# Altium PCB MCU-3.14-NEW.PcbDoc
Units mil, origin at the board's own origin, x right, y up, seen from the top; angles counter-clockwise.
Board outline 1574.8 x 1496.06 mil, 2 copper layers (Top Layer, Bottom Layer); 36 components, 67 nets, 265 pads, 66 vias.
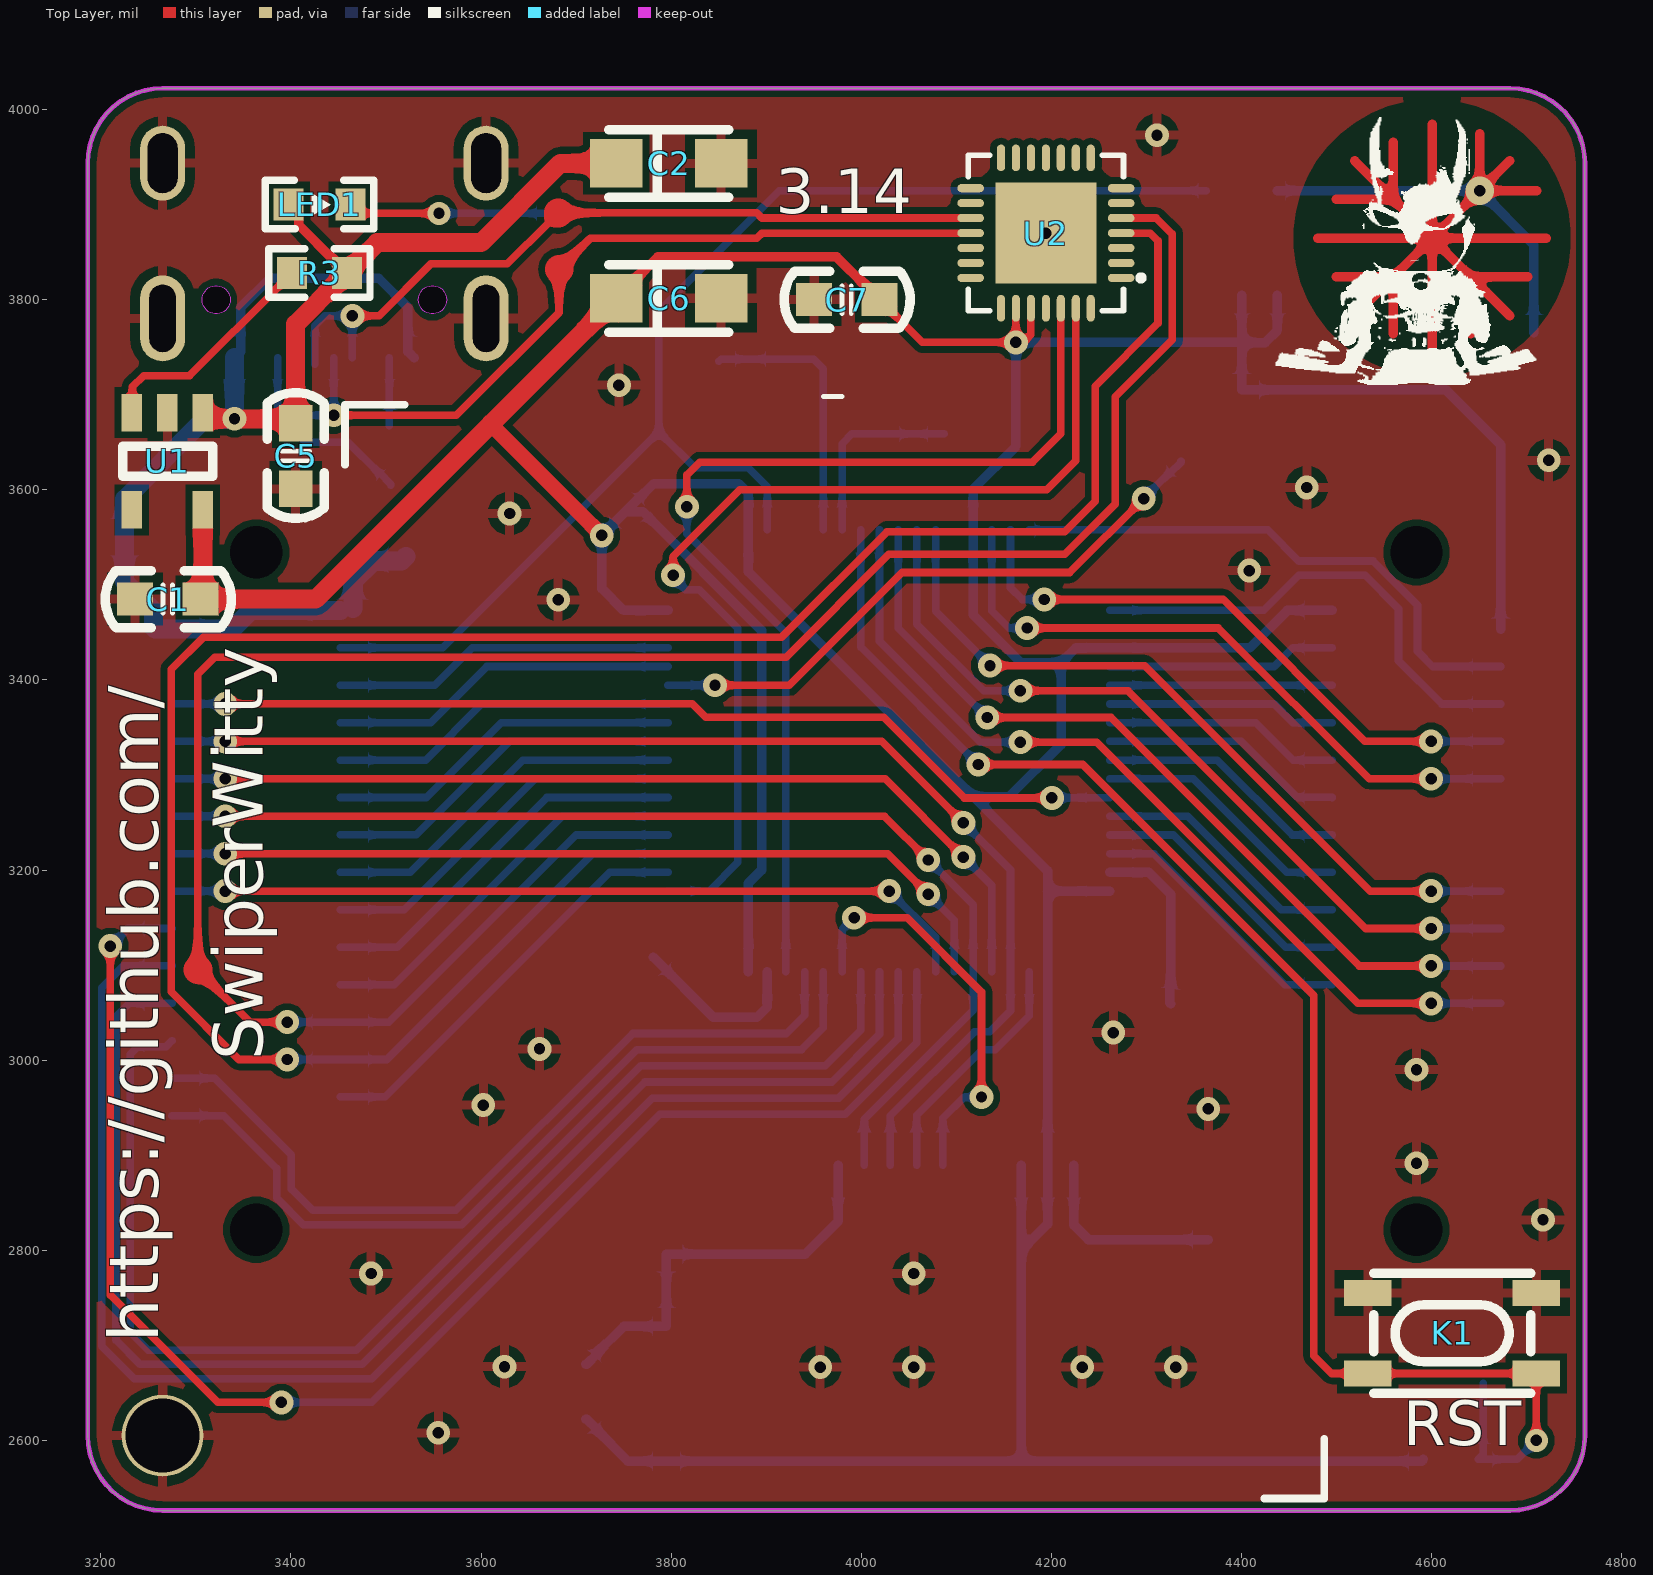
[diagram p0: Top Layer view]
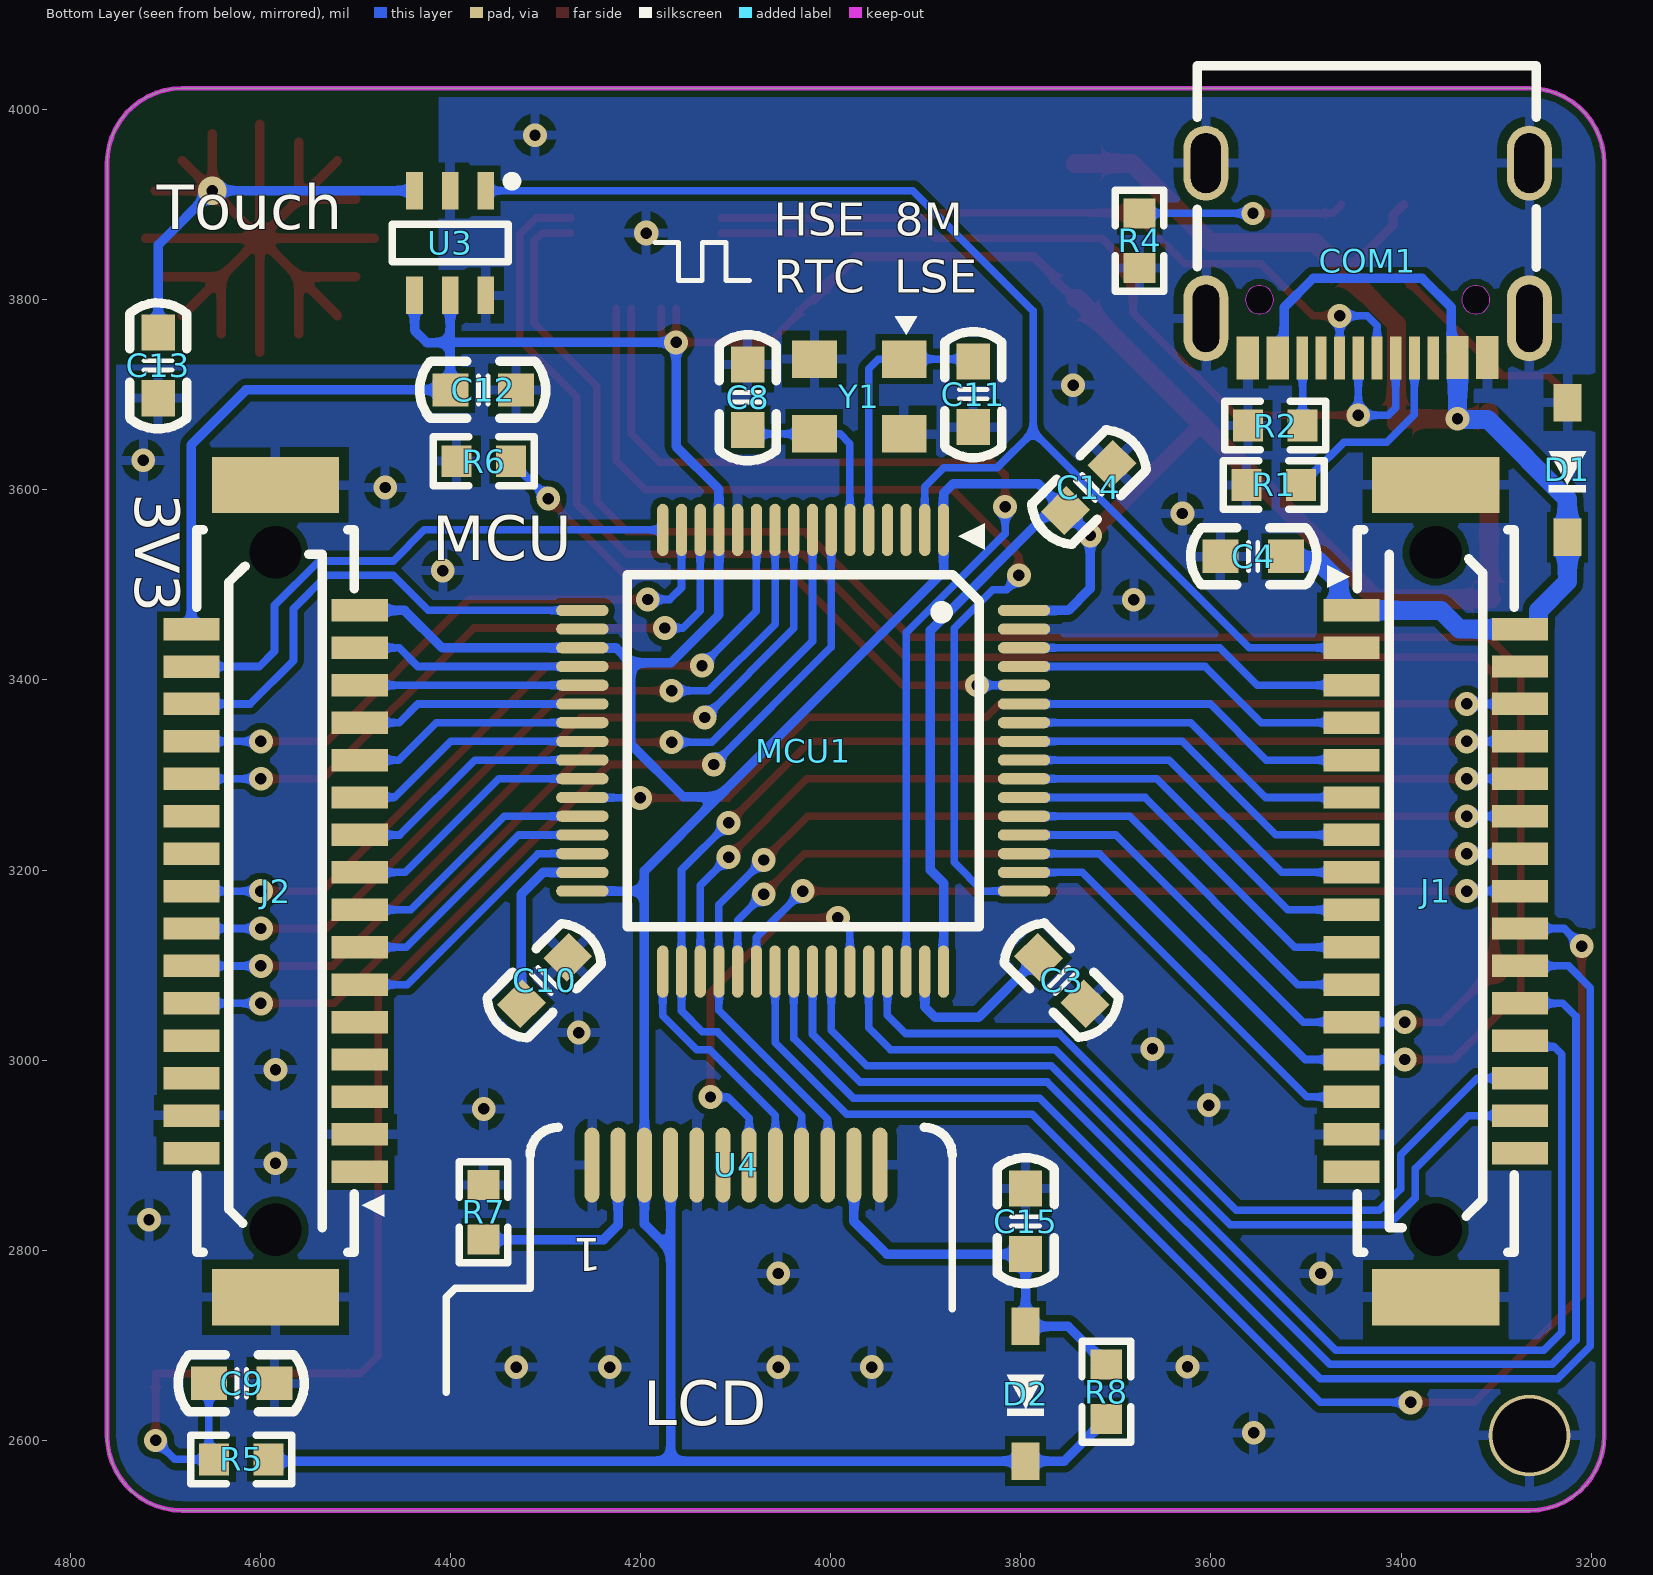
[diagram p1: Bottom Layer view, seen from below]
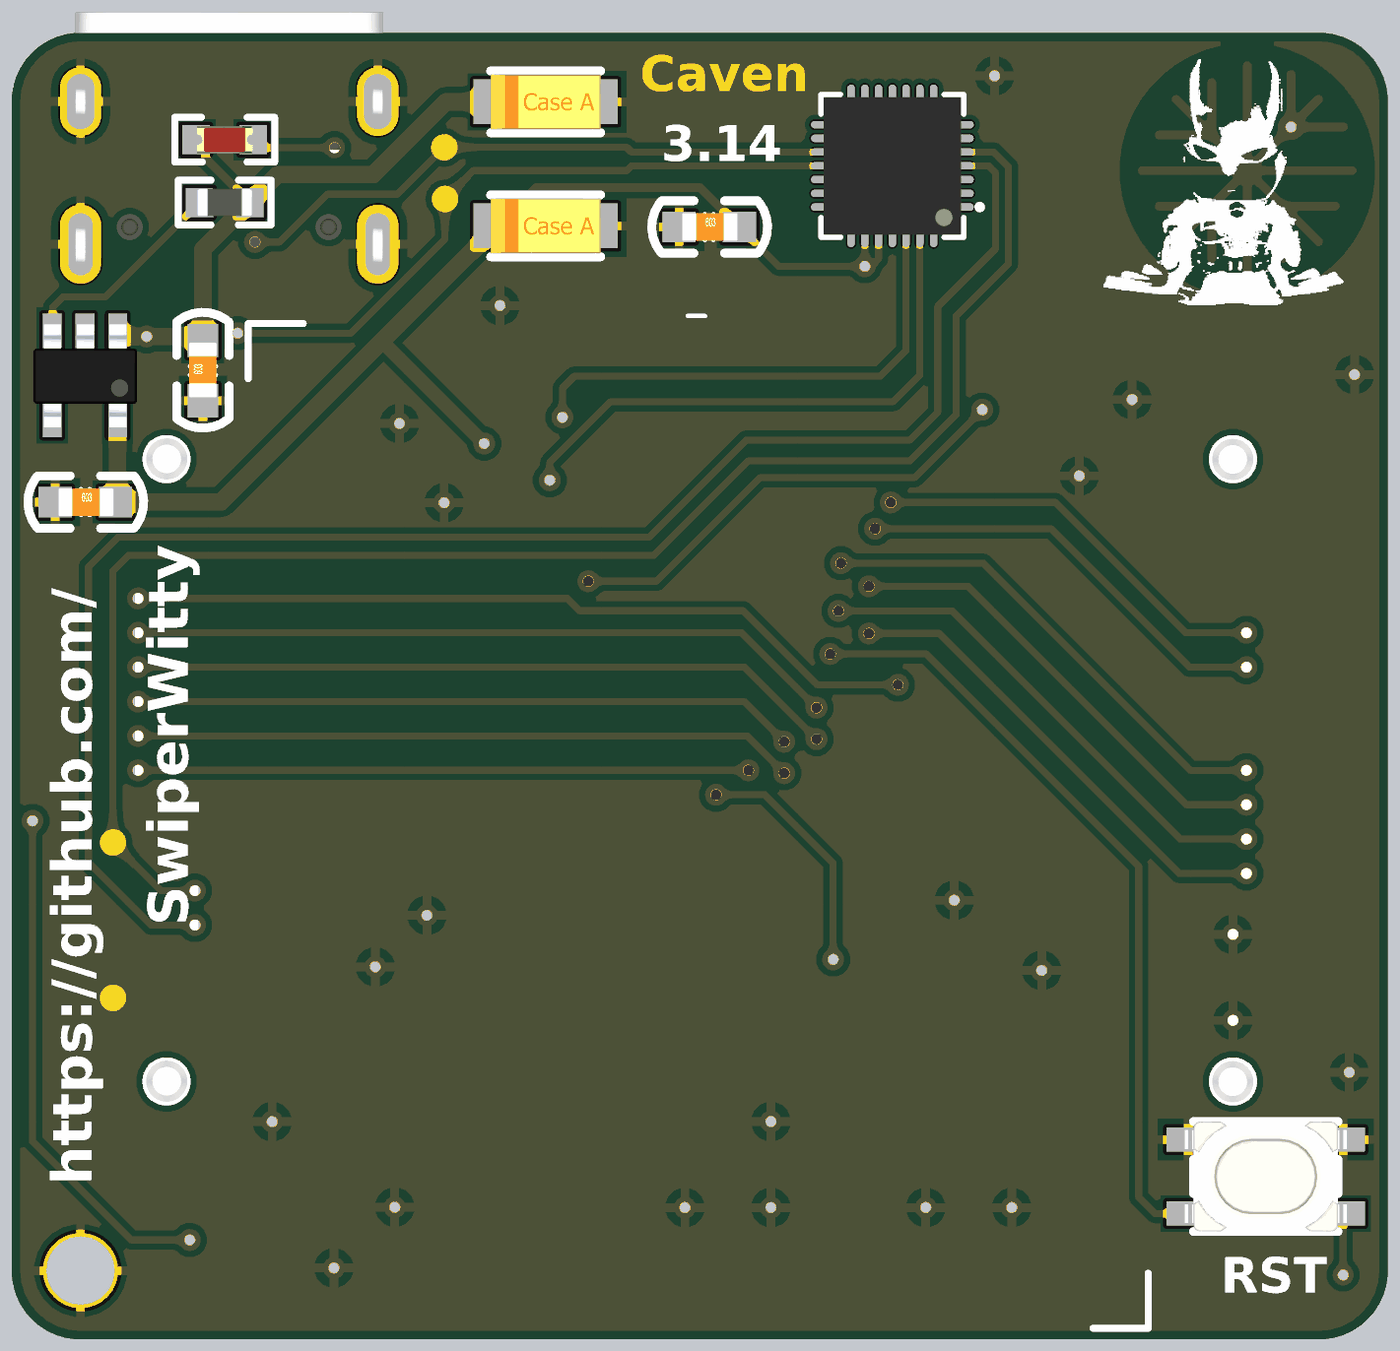
[diagram p2: 3D render of the assembled board from above, using the file's embedded part models]
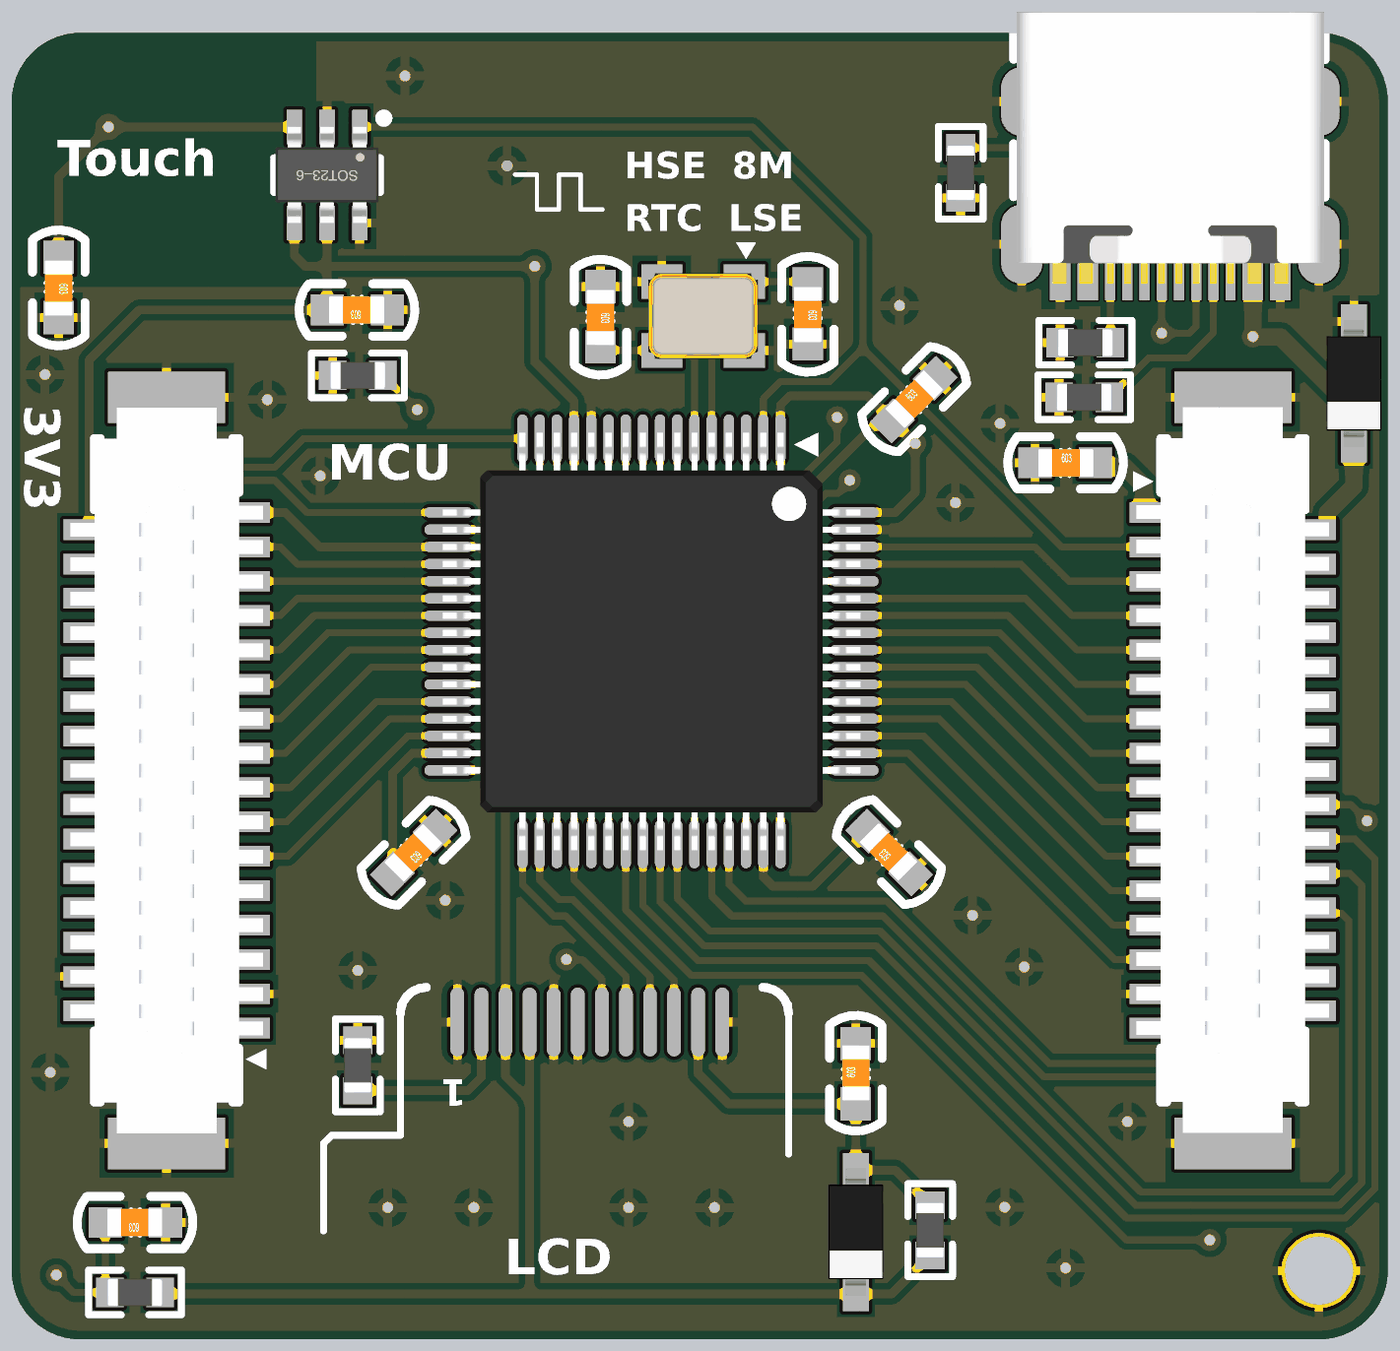
[diagram p3: 3D render of the assembled board from below, using the file's embedded part models]

## Layer stack, top to bottom
Top Solder: solder mask 0.4, Solder Resist, Dk 3.5
Top Layer: signal copper 1.4
Dielectric 1: dielectric 12.6, FR-4, Dk 4.8
Bottom Layer: signal copper 1.4
Bottom Solder: solder mask 0.4, Solder Resist, Dk 3.5

## Board outline
3186.26,2605 ccw(c3265,2605) 3265,2526.26 4682.32,2526.26 ccw(c4682.32,2605) 4761.06,2605 4761.06,3943.58 ccw(c4682.32,3943.58) 4682.32,4022.32 3297.49,4022.32 3265,4022.32 ccw(c3265,3943.58) 3186.26,3943.58

## Design rules (kind name [scope] priority, off if disabled: settings)
Clearance [All] p1: gap=7 ignorepadtopadclearanceinfootprint=TRUE
HoleSize [All] p1: absolutevalues=TRUE maxlimit=500 minlimit=1 maxpercent=80.000 minpercent=20.000
HoleToHoleClearance [All] p1: gap=6 allowstackedmicrovias=TRUE
MinimumSolderMaskSliver [All] p1: minsoldermaskwidth=3
PolygonConnect [All] p1: connectstyle=Relief reliefconductorwidth=10 reliefentries=4 polygonreliefangle="90 Angle" airgapwidth=10
RoutingVias [All] p1: holewidth=28 width=50 viastyle="Through Hole" minholewidth=12 minwidth=24 maxholewidth=28 maxwidth=50
SilkToSilkClearance [All] p1: silktosilkclearance=0
SilkToSolderMaskClearance [IsPad] p1: minsilkscreentomaskgap=0 clearancetoexposedcopper=TRUE
SolderMaskExpansion [All] p1: expansion=4 istentingtop=FALSE
Width [All] p1: maxlimit=60 minlimit=8 preferedwidth=8
25 further rules are at their usual default settings.

## Classes and differential pairs
component class Sheet1: C1 C2 C3 C5 C7 C9 C11 C13 C15 COM1 D1 D2 J1 J2 K1 LED1 MCU1 R1 R2 R3 R4 R5 R6 R7 R8 U1 U2 U3 U4 Y1

## Components (designator, comment, footprint, x,y, rotation, side; value= is the part's Value field where it differs from the comment)
C1 "100NF" CAP_0603 3236,3485 r0 top
C2 "100UF" CAP_3216_A 3797.32,3943.28 r180 top
C3 "10UF" CAP_0603 3732.48,3059.4 r45 bottom
C4 "100NF" CAP_0603 3590,3530 r180 bottom
C5 "100NF" CAP_0603 3405,3601 r90 top
C6 "100UF" CAP_3216_A 3797.32,3801.26 r180 top
C7 "100NF" CAP_0603 3950,3800 r0 top
C8 "22PF" CAP_0603 4087.25,3731.71 r270 bottom
C9 "100NF" CAP_0603 4585,2660 r0 bottom
C10 "10UF" CAP_0603 4276.55,3108.19 r315 bottom
C11 "22PF" CAP_0603 3850,3735 r270 bottom
C12 "100NF" CAP_0603 4331,3705 r0 bottom
C13 "22PF" CAP_0603 4707.32,3765.26 r270 bottom
C14 "100NF" CAP_0603 3753,3578 r135 bottom
C15 "4.7UF" CAP_0603 3795,2796 r90 bottom
COM1 "Type-C" USB-Type-C_16A 3435.07,3942.59 r0 bottom
D1 "B5819W" DIODE_SOD123 3225,3691.73 r270 bottom
D2 "1N4148" DIODE_SOD123 3795,2720 r270 bottom
J1 "31PIN" BTB-DM3-31P 3363.43,3534.14 r270 bottom
J2 "31PIN" BTB-DM3-31P 4583.9,2821.54 r90 bottom
K1 "KEY" KEY_SMD-4P 4532.83,2755 r0 top
LED1 "LED_R/G/B/Y" LED_0603_R 3430,3900 r180 top
MCU1 "STM32F405RET6" LQFP_64_10X10 4028.91,3325.47 r0 bottom
R1 "5.1K" RESC_0603_2 3533.74,3605 r180 bottom
R2 "5.1K" RESC_0603_2 3532.32,3667.53 r180 bottom
R3 "10K" RESC_0603_2 3430,3828 r180 top
R4 "10K" RESC_0603_2 3675,3862 r90 bottom
R5 "10K" RESC_0603_2 4620,2580 r0 bottom
R6 "10K" RESC_0603_2 4365,3630 r0 bottom
R7 "20R" RESC_0603_2 4365,2840 r270 bottom
R8 "4.7K" RESC_0603_2 3710,2651.26 r90 bottom
U1 "SPX3819M5-L" SOT23_5 3270,3630 r90 top
U2 "CH549F" QFN28_4X4_L 4273.2,3822.8 r180 top
U3 "TTP223" SOT-23-6 4362.78,3914.58 r270 bottom
U4 "TFT_1.3_12Pin" LCD_1.3B 4271.06,2909.32 r180 top
Y1 "8MHz" XTAL_SMD_3225 3969.85,3698.08 r0 bottom

## Footprints (in the part's own frame and the unit in brackets; to place one, negate y for a bottom-side part, rotate by r counter-clockwise, add the part's x,y. Pads: shape width x height; smd on the part's side, far side on the other; paste and mask are expansions set on the pad)
BTB-DM3-31P [mm]
  rect 0.6x1.5 smd: 1(1.55,-2.25) 2(2.05,2.25) 3(2.55,-2.25) 4(3.05,2.25) 5(3.55,-2.25) 6(4.05,2.25) 7(4.55,-2.25) 8(5.05,2.25) 9(5.55,-2.25) 10(6.05,2.25) 11(6.55,-2.25) 12(7.05,2.25) 13(7.55,-2.25) 14(8.05,2.25) 15(8.55,-2.25) 16(9.05,2.25) 17(9.55,-2.25) 18(10.05,2.25) 19(10.55,-2.25) 20(11.05,2.25) 21(11.55,-2.25) 22(12.05,2.25) 23(12.55,-2.25) 24(13.05,2.25) 25(13.55,-2.25) 26(14.05,2.25) 27(14.55,-2.25) 28(15.05,2.25) 29(15.55,-2.25) 30(16.05,2.25) 31(16.55,-2.25)
  rect 1.5x3.4 smd: 32(19.9,0) 33(-1.8,0)
  round 1.219 hole 1.4 unplated: ""(0,0) ""(18.1,0)
  silkscreen extent -0.6,-2.9 18.7,2.1, body extent -1.51,-2.81 19.59,2.79, height 3.35
CAP_0603 [mil]
  rect 38x35 smd: 1(0,0) 2(69,0)
  silkscreen extent -31,-30 101,30, body extent 4,-16 67,16, height 12
CAP_3216_A [mm]
  rect 1.4x1.3 smd: 1(1.4,0) 2(-1.4,0)
  silkscreen extent -1.6,-0.9 1.6,0.9, body extent -1.6,-0.8 1.6,0.8, height 1.6
DIODE_SOD123 [mm]
  rect 1x0.75 smd: 1(0,0) 2(3.6,0)
  silkscreen extent 1.3,-0.5 2.4,0.5, body extent -0.05,-0.8 3.65,0.8, height 1.27
KEY_SMD-4P [mm] "3*4*2.5MM"
  rect 1.27x0.7 smd: 1(0,0) 1(4.5,0) 2(0,-2.15) 2(4.5,-2.15)
  silkscreen extent 0.15,-2.68 4.35,0.52, body extent -0.1,-2.67 4.6,0.53, height 2.51
LCD_1.3B [mm]
  oval 0.4x2 smd far side: 1(0.508,0.5) 2(1.208,0.5) 3(1.908,0.5) 4(2.608,0.5) 5(3.308,0.5) 6(4.008,0.5) 7(4.708,0.5) 8(5.408,0.5) 9(6.108,0.5) 10(6.808,0.5) 11(7.508,0.5) 12(8.208,0.5)
  silkscreen extent -5.48,-19.81 20.68,9.41, body extent -5.48,-19.81 20.68,9.41, height 1
LED_0603_R [mm]
  rect 0.8x0.85 smd: 1(-0.832,0) 2(0.832,0)
  silkscreen extent -1.45,-0.65 1.45,0.65, body extent -0.81,-0.4 0.81,0.4, height 0.6
LQFP_64_10X10 [mm]
  oval 0.3x1.4 smd: 1(-3.75,-5.9) 2(-3.25,-5.9) 3(-2.75,-5.9) 4(-2.25,-5.9) 5(-1.75,-5.9) 6(-1.25,-5.9) 7(-0.75,-5.9) 8(-0.25,-5.9) 9(0.25,-5.9) 10(0.75,-5.9) 11(1.25,-5.9) 12(1.75,-5.9) 13(2.25,-5.9) 14(2.75,-5.9) 15(3.25,-5.9) 16(3.75,-5.9) 33(3.75,5.9) 34(3.25,5.9) 35(2.75,5.9) 36(2.25,5.9) 37(1.75,5.9) 38(1.25,5.9) 39(0.75,5.9) 40(0.25,5.9) 41(-0.25,5.9) 42(-0.75,5.9) 43(-1.25,5.9) 44(-1.75,5.9) 45(-2.25,5.9) 46(-2.75,5.9) 47(-3.25,5.9) 48(-3.75,5.9)
  oval 1.4x0.3 smd: 17(5.9,-3.75) 18(5.9,-3.25) 19(5.9,-2.75) 20(5.9,-2.25) 21(5.9,-1.75) 22(5.9,-1.25) 23(5.9,-0.75) 24(5.9,-0.25) 25(5.9,0.25) 26(5.9,0.75) 27(5.9,1.25) 28(5.9,1.75) 29(5.9,2.25) 30(5.9,2.75) 31(5.9,3.25) 32(5.9,3.75) 49(-5.9,3.75) 50(-5.9,3.25) 51(-5.9,2.75) 52(-5.9,2.25) 53(-5.9,1.75) 54(-5.9,1.25) 55(-5.9,0.75) 56(-5.9,0.25) 57(-5.9,-0.25) 58(-5.9,-0.75) 59(-5.9,-1.25) 60(-5.9,-1.75) 61(-5.9,-2.25) 62(-5.9,-2.75) 63(-5.9,-3.25) 64(-5.9,-3.75)
  silkscreen extent -4.85,-6.08 4.7,4.7, body extent -6.07,-6.07 6.07,6.07, height 1.62
QFN28_4X4_L [mil]
  oval 28x8.6 smd mask+2: 1(0,0) 2(0,-15.7) 3(0,-31.5) 4(0,-47.2) 5(0,-63) 6(0,-78.7) 7(0,-94.4) 15(158.2,-94.4) 16(158.2,-78.7) 17(158.2,-63) 18(158.2,-47.2) 19(158.2,-31.5) 20(158.2,-15.7) 21(158.2,0)
  oval 8.6x28 smd mask+2: 8(31.9,-126.3) 9(47.6,-126.3) 10(63.4,-126.3) 11(79.1,-126.3) 12(94.9,-126.3) 13(110.6,-126.3) 14(126.3,-126.3) 22(126.3,31.9) 23(110.6,31.9) 24(94.9,31.9) 25(79.1,31.9) 26(63.4,31.9) 27(47.6,31.9) 28(31.9,31.9)
  rect 106.3x106.3 smd mask+2: 29(79.1,-47.2)
  silkscreen extent -24,-129 161,35, body extent 0,-126 158,32, height 35
RESC_0603_2 [mm]
  rect 0.8x0.85 smd: 1(-0.73,0) 2(0.73,0)
  silkscreen extent -1.35,-0.65 1.35,0.65, body extent -0.8,-0.4 0.8,0.4, height 0.38
SOT23_5 [mm]
  rect 1x0.55 smd: 1(1.3,-0.95) 2(1.3,0) 3(1.3,0.95) 4(-1.3,0.95) 5(-1.3,-0.95)
  silkscreen extent -0.4,-1.21 0.4,1.19, body extent -1.52,-1.51 1.48,1.49, height 1.3
SOT-23-6 [mm]
  rect 1x0.45 smd: 1(0,0) 2(0,-0.95) 3(0,-1.9) 4(2.794,-1.9) 5(2.794,-0.95) 6(2.794,0)
  silkscreen extent -0.38,-2.5 1.91,0.82, body extent -0.01,-2.45 2.8,0.55, height 1.15
USB-Type-C_16A [mm]
  oval 1.199x1.999 hole 0.8 slot 1.6 at 90 deg mask+0.051: 0(-4.32,-0.025) 0(4.321,-0.025)
  oval 1.199x2.301 hole 0.701 slot 1.801 at 90 deg mask+0.051: 0(-4.32,4.123) 0(4.321,4.123)
  round 0 hole 0.65: 0(-2.889,3.592) 0(2.891,3.592)
  rect 0.3x1.151 smd mask+0.05: A5(-1.249,5.179) A6(-0.248,5.177) A7(0.25,5.177) A8(-1.749,5.177) B5(1.751,5.177) B6(0.75,5.177) B7(-0.749,5.177) B8(1.25,5.177)
  rect 0.599x1.151 smd mask+0.05: A9(-2.4,5.174) A12(-3.2,5.174) B1(3.201,5.177) B4(2.401,5.177)
  Keep-Out Layer board cut-out: -2.514,3.625 -2.551,3.788 -2.655,3.919 -2.806,3.991 -2.973,3.991 -3.124,3.919 -3.229,3.788 -3.266,3.625 -3.266,3.625 -3.229,3.462 -3.124,3.331 -2.973,3.258 -2.806,3.258 -2.655,3.331 -2.551,3.462 -2.514,3.625
  Keep-Out Layer board cut-out: 3.267,3.625 3.23,3.788 3.126,3.919 2.975,3.991 2.808,3.991 2.657,3.919 2.553,3.788 2.515,3.625 2.515,3.625 2.553,3.462 2.657,3.331 2.808,3.258 2.975,3.258 3.126,3.331 3.23,3.462 3.267,3.625
  silkscreen extent -4.5,-2.63 4.56,2.75, body extent -4.47,-2.63 4.47,5.27, height 3.25
XTAL_SMD_3225 [mm]
  rect 1.2x1 smd: 1(-1.2,-1) 2(1.2,-1) 3(1.2,1) 4(-1.2,1)
  silkscreen extent -1.55,-2.15 -0.95,-1.65, body extent -1.6,-1.25 1.6,1.25, height 0.6

## Part data
C1 C3 C4 C5 C7 C8 C9 C10 C11 C12 C13 C14 C15: library part CAP, "CAP  12~50V"
C2 C6: library part CAP_TA, "CAP  6~12V  钽电容"
COM1: library part USB-type_c, "USB"
D1 D2: library part Diode-SM, "Diode_肖特基/二极管"
J1 J2: library part BTB_DF3_31Pin, "BTB"
K1: "Key"
LED1: library part LED_SMT, "LED"
MCU1: library part STM32f4_R, "MCU"
R1 R2 R3: library part RES, "RES 贴片"
R4 R5 R6 R7 R8: library part RES_S, "RES 贴片"
U1: "DC-DC   3.3V  500ma"
U2: "MCU", External Clock Frequency Rang=6MHz~25MHz, JLCPCB Part Class="Extended Part", Manufacturer=WCH(南京沁恒), Maximum Frequency=48MHz, Operating Temperature Range=-40~+70, Supply Voltage Range=3.3V~5V, 8Bit Timer Number=-, 16Bit Timer Number=3, 32Bit Timer Number=-, (E)PWM (Units/Channels/bits)=1@x8ch/8bit, (Q)SPI Number=1, ADC (Units/Channels/bits)=1@x16ch/12bit, Add into BOM=yes, CAN Number=-, CMP Number=-, Convert to PCB=yes, CPU Core=51系列, DAC (Units/Channels/bits)=-, Datasheet=https://atta.szlcsc.com/upload/public/pdf/source/20200819/C367229_D216FC0E0489DFB21C5778C34F7DC8A5.pdf, Device=CH549F, EEPROM/Data FLASH Size=1KB, GPIO Ports Number=-, I2C Number=-, I2S Number=-, Internal Oscillator=有, LCSC Part Name=CH549F, Manufacturer Part=CH549F, Peripherals / Functions / Protocol Stacks=低电压检测；看门狗；CCP捕获/比较；触控按键；片载温度传感器；CRC校验；DMA, Program FLASH Size=64KB, RAM Size=2.25KB, Supplier=LCSC, Supplier Footprint=QFN-28, Supplier Part=C367229, Symbol=CH549F, U(S)ART Number=4, USB (H/D/OTG)="全速USB Host/Device"
U3: "触摸芯片"
U4: library part "LCD_1.3   T", "ST7789V-SPI"
Y1: library part XTAL_4P, "Crystal Oscillator"

## Free pads (board coordinates)
  round 86 hole 78: 0(3265,2605)

## Via types
v1: diameter 25, hole 12, Top Layer to Bottom Layer, tented both sides, 62 vias
v2: diameter 24, hole 12, Top Layer to Bottom Layer, tented both sides, 2 vias
v3: diameter 30, hole 12, Top Layer to Bottom Layer, tented both sides, 1 vias
v4: diameter 26, hole 12, Top Layer to Bottom Layer, tented both sides, 1 vias

## Nets (pads, with @x,y where several pads share a name; then routed paths per layer and width w, separated by ;. In a path a pad name is that pad's centre, name@x,y a point inside that pad or via, vN(x,y) a via of type N, cw(c..) or ccw(c..) an arc to the next point about the centre after c; other vN are vias at no path point)
BOOT0: MCU1.60 R6.1 | length 637.8
  Top Layer w8: v1(3846.08,3394.37) 3924.33,3394.37 4042.96,3513 4219.26,3513 v1(4297,3590.74)
  Bottom Layer w8: MCU1.60 v1(3846.08,3394.37) ; v1(4297,3590.74) 4323.53,3617.27 4324.51,3617.27 4336.26,3629.02 R6.1
BOOT1: J2.15 MCU1.28 | length 274.9
  Bottom Layer w8: MCU1.28 4343.43,3256.57 4441.85,3158.15 J2.15
CAN_RX: J1.28 MCU1.44 | length 895.7
  Bottom Layer w8: J1.28 3329.38,2941.62 3385,2886 3385,2855 3413,2827 3579.57,2827 3763.57,3011 3937,3011 3960.01,3034.01 MCU1.44
CAN_TX: J1.26 MCU1.45 | length 875
  Bottom Layer w8: J1.26 3320.01,2980.99 3400.5,2900.5 3400.5,2864.5 3423,2842 3573.36,2842 3759.36,3028 3921,3028 3940.33,3047.33 MCU1.45
CC1: COM1.A5 R1.2 | length 210
  Bottom Layer w8: COM1.A5 3385.9,3679.1 3415,3650 3460,3650 3492.27,3617.73 3493.25,3617.73 3505,3605.98 R1.2
CC2: COM1.B5 R2.2 | length 71.3
  Bottom Layer w8: R2.2 COM1.B5@3503.58,3738.78
CH_RXD: J1.25 MCU1.51 U2.4 | length 2369.6
  Top Layer w8: v1(3396.01,3000.67) 3345.33,3000.67 3274,3072 3274,3411 3308,3445 3916,3445 4027,3556 4214,3556 4246,3588 4246,3709 4312,3775 4312,3862 4304,3870 U2.4
  Bottom Layer w8: v1(3396.01,3000.67) J1.25 3500.67,3000.67 3717.2,3217.2 MCU1.51
CH_TXD: J1.23 MCU1.52 U2.5 | length 2319.1
  Top Layer w8: v1(3396.01,3040.04) 3356.96,3040.04 3302,3095 3302,3406 3320,3424 3921,3424 4029,3532 4214,3532 4267,3585 4267,3698 4327,3758 4327,3869 4310.2,3885.8 U2.5
  Top Layer w30: 3302,3095 3302.28,3095.28
  Bottom Layer w8: v1(3396.01,3040.04) J1.23 3503.04,3040.04 3699.89,3236.89 MCU1.52
D+: COM1.A6 COM1.B6 U2.17 | length 825.7
  Top Layer w8: v1(3464.6,3782.84) 3492.63,3782.84 3547.32,3837.53 3627.63,3837.53 3670.43,3880.33 ; 3670.57,3880.47 3670.71,3880.61 3681.38,3891.27 3890,3891.27 3895.47,3885.8 U2.17
  Top Layer w30: 3681.1,3890.99 3681.38,3891.27
  Bottom Layer w8: COM1.A6@3425.23,3732.25 3425.23,3772.44 3435.63,3782.84 v1(3464.6,3782.84) COM1.B6
D-: COM1.A7 COM1.B7 U2.18 | length 931.3
  Top Layer w8: v1@3446.1,3677.21 3447.29,3678.4 3573.95,3678.4 3682,3786.45 3682,3831.89 3714.63,3864.53 3890,3864.53 3895.47,3870 U2.18
  Top Layer w30: 3682,3831.89 3682.28,3832.17
  Bottom Layer w8: COM1.B7 3405.6,3686.3 3413.5,3678.4 v1(3444.97,3678.4) 3444.97,3738.71 COM1.A7
D/C: MCU1.43 U4.7 | length 437.7
  Top Layer w8: v1(3992.32,3149.84) 4048.16,3149.84 4126.32,3071.68 v1(4126.32,2961.26)
  Bottom Layer w8: MCU1.43 3979.7,3137.21 v1(3992.32,3149.84) ; U4.7 4085.71,2938.71 4107.97,2960.97 4126.03,2960.97 v1(4126.32,2961.26)
DAC_OUT1: J2.29 MCU1.20 | length 242.3
  Bottom Layer w8: MCU1.20 4434.05,3414.05 4453.74,3433.74 J2.29
DAC_OUT2: J2.27 MCU1.21 | length 234.1
  Bottom Layer w8: MCU1.21 J2.27
DIR: J2.21 MCU1.24 | length 258.6
  Bottom Layer w8: MCU1.24 4399.69,3335.31 4458.47,3276.53 4495.04,3276.53 J2.21
GND: C1.1 C2.2 C3.1 C4.1 C5.1 C6.2 C7.1 C8.1 C9.1 C10.1 C11.2 C12.1 C13.2 C14.2 C15.2 COM1.0@3265,3780.28 COM1.0@3265,3943.58 COM1.0@3605.2,3780.28 COM1.0@3605.2,3943.58 COM1.A12 COM1.B1 D1.1 J1.29 J1.32 J1.33 J2.3 J2.4 J2.32 J2.33 K1.1 MCU1.12 MCU1.18 MCU1.63 pad.0 R1.1 R2.1 R4.1 R6.2 R7.1 U1.2 U2.29 U3.2 U3.6 U4.1 U4.5 U4.6 U4.12 Y1.2 Y1.4
  other v1: 3555,2608 3956.69,2677.17 4055.12,2677.17 4232.28,2677.17 4330.71,2677.17 3624.6,2677.6 3484.25,2775.59 4055.12,2775.59 4717,2832 4583.9,2891.54 4365,2948.74 3602.36,2952.76 4583.9,2989.96 3661.42,3011.81 4265,3029 3681.1,3484.25 4408,3515 3630,3575 4468.5,3602.36 4723,3631 3745,3710 4311,3973
  other v4: 4194.1,3870
GPIOA: J1.15 MCU1.56 | length 393.5
  Bottom Layer w8: J1.15 3525.53,3197.53 3643.63,3315.63 MCU1.56
GPIOB: J1.13 MCU1.57 | length 385.4
  Bottom Layer w8: J1.13 3531.9,3236.9 3630.31,3335.31 MCU1.57
MISO_2: J1.10 MCU1.35 | length 999.3
  Top Layer w8: v1(3330.85,3295.95) 4024.94,3295.95 v1(4107.32,3213.57)
  Bottom Layer w8: J1.10 v1(3330.85,3295.95) ; v1(4107.32,3213.57) 4137.18,3183.72 MCU1.35
MOSI_2: J1.12 MCU1.36 U4.10 | length 1202.4
  Top Layer w8: v1(3330.85,3256.58) 4024.31,3256.58 v1(4070.32,3210.57)
  Bottom Layer w8: J1.12 v1(3330.85,3256.58) ; U4.10 4003.03,2938.03 4117.49,3052.49 MCU1.36 4117.49,3163.4 v1(4070.32,3210.57)
NetC3_2: C3.2 MCU1.47 | length 187.6
  Bottom Layer w10: C3.2 3844.46,3045 3890,3045 3900.96,3055.96 MCU1.47
NetC10_2: C10.2 MCU1.31 | length 189.8
  Bottom Layer w10: MCU1.31 4302.48,3197.52 4325.34,3174.66 4325.34,3080.61 4324.28,3079.55 4324.28,3060.46 C10.2
NetLED1_1: LED1.1 R4.2 | length 216.5
  Top Layer w8: LED1.1 3472,3890.74 v2(3555.74,3890.74)
  Bottom Layer w8: v2(3555.74,3890.74) R4.2 ; R4.2@3674.74,3889 R4.2@3675,3888.74
NetR3_2: R3.2 U1.3 | length 245.5
  Top Layer w8: U1.3 3233.18,3681.76 3233.18,3708.18 3245,3720 3293.26,3720 3388.53,3815.27 3389.51,3815.27 3401.26,3827.02 R3.2
NetR7_2: R7.2 U4.2 | length 210.9
  Bottom Layer w10: U4.2 4223.5,2826.5 4238.74,2811.26 R7.2
NRST: C9.2 K1.2 MCU1.7 R5.2 | length 1594.4
  Top Layer w8: v1(4123,3311) 4233,3311 4476,3068 4476,2689 4494.64,2670.36 4532.83,2670.36 4710,2670.35 v2(4710,2600)
  Bottom Layer w8: MCU1.7 3999.38,3434.62 v1(4123,3311) ; C9.2 4654,2585.26 R5.2 4690,2580 v2(4710,2600)
NSS_2: MCU1.33 U4.8 | length 260.8
  Bottom Layer w8: U4.8 4058.15,2942.14 4127.01,3011 4141,3011 4176.55,3046.55 MCU1.33
NSS_2_2: J1.6 MCU1.27 | length 1027.4
  Top Layer w8: v1(3330.85,3374.69) 3822.31,3374.69 3836.5,3360.5 4023.5,3360.5 4108.2,3275.8 v1(4200.45,3275.8)
  Bottom Layer w8: J1.6 v1(3330.85,3374.69) ; v1@4200.45,3276.03 4260.97,3276.03 MCU1.27
NSS_2_3: J2.17 MCU1.26 | length 274.9
  Bottom Layer w8: MCU1.26 4349.06,3295.94 4447.48,3197.52 J2.17
PC00: J2.10 MCU1.8 | length 928.3
  Top Layer w8: v1(4167.32,3334.57) 4247.43,3334.57 4522.28,3059.72 v1(4599.32,3059.72)
  Bottom Layer w8: MCU1.8 4019.07,3440.59 4125.09,3334.57 v1(4167.32,3334.57) ; v1(4599.32,3059.72) J2.10
PC01: J2.12 MCU1.9 | length 884.4
  Top Layer w8: v1(4132.5,3360.39) 4262.61,3360.39 4523.91,3099.09 v1(4599.32,3099.09)
  Bottom Layer w8: MCU1.9 4038.75,3454.14 v1(4132.5,3360.39) ; v1(4599.32,3099.09) J2.12
PC02: J2.14 MCU1.10 | length 845.8
  Top Layer w8: v1(4167.32,3388.57) 4280.43,3388.57 4530.54,3138.46 v1(4599.32,3138.46)
  Bottom Layer w8: MCU1.10 4058.44,3458.68 4128.55,3388.57 v1(4167.32,3388.57) ; v1(4599.32,3138.46) J2.14
PC03: J2.16 MCU1.11 | length 801.8
  Top Layer w8: v1(4135.32,3415.03) 4297.97,3415.03 4535.17,3177.83 v1(4599.32,3177.83)
  Bottom Layer w8: MCU1.11 4078.12,3472.23 v1(4135.32,3415.03) ; v1(4599.32,3177.83) J2.16
PC12: J1.21 MCU1.53 | length 418
  Bottom Layer w8: J1.21 3508.41,3079.41 3685.57,3256.57 MCU1.53
PC13: J1.3 MCU1.2 U3.1 | length 1367.6
  Bottom Layer w8: J1.3 3559.75,3433.75 3787,3661 ; MCU1.2 3900.96,3603.04 3881,3623 3825,3623 3787,3661 ; U3.1 3913.58,3914.58 3787,3788 3787,3661
PD02: J1.19 MCU1.54 | length 409.8
  Bottom Layer w8: J1.19 3511.79,3118.79 3669.26,3276.26 MCU1.54
RES: C15.1 D2.1 R8.2 U4.11 | length 432.1
  Bottom Layer w10: R8.2 3710.98,2680 3722.73,2691.75 3722.73,2692.73 3750,2720 D2.1 C15.1 3941,2796 3975.47,2830.47 U4.11
SCK_2: J1.8 MCU1.34 U4.9 | length 1310.1
  Top Layer w8: v1(3330.85,3335.32) 4021.57,3335.32 v1(4107.32,3249.57)
  Bottom Layer w8: J1.8 v1(3330.85,3335.32) ; U4.9 4030.59,2941.55 4119.04,3030 4135,3030 4156.86,3051.86 MCU1.34 4156.86,3200.03 v1(4107.32,3249.57)
SCL_2: J2.13 MCU1.29 | length 283
  Bottom Layer w8: MCU1.29 4328.11,3236.89 4446.22,3118.78 J2.13
SDA_2: J2.11 MCU1.30 | length 291.2
  Bottom Layer w8: MCU1.30 4307.8,3217.2 4445.59,3079.41 J2.11
STEP: J2.19 MCU1.25 | length 266.7
  Bottom Layer w8: MCU1.25 4374.37,3315.63 4453.11,3236.89 J2.19
SWCLK: MCU1.49 U2.27 | length 1071.2
  Top Layer w8: v1@3802.82,3510.82 v1(3802,3510) 3802,3530 3872,3600 4195,3600 4225.6,3630.6 U2.27
  Bottom Layer w8: MCU1.49 3839.83,3177.83 3870,3208 3870,3454.37 3829.37,3495 3815.02,3495 3802,3508.02 v1(3802,3510)
SWDIO: MCU1.46 U2.26 | length 1108.8
  Top Layer w8: v1(3816.47,3582.05) 3816.47,3615.47 3830,3629 4180,3629 4209.8,3658.8 U2.26
  Bottom Layer w8: v1(3816.47,3582.05) 3816.47,3553.97 3920.64,3449.8 MCU1.46
TM1_CH1: J1.22 MCU1.41 | length 1428.7
  Bottom Layer w8: J1.22 3229.73,3059.73 3216,3046 3216,2705.21 3241.21,2680 3475,2680 3772,2977 3968.92,2977 4019.07,3027.15 MCU1.41
TM1_CH2: J1.24 MCU1.42 | length 1319.3
  Bottom Layer w8: J1.24 3268.56,3014.07 3238.83,3014.07 3231,3006.24 3231,2714 3250,2695 3468.79,2695 3767.79,2994 3961.88,2994 3999.38,3031.51 MCU1.42
TM2_CH1: J1.27 MCU1.50 | length 442.5
  Bottom Layer w8: J1.27 3499.3,2961.3 3735.52,3197.52 MCU1.50
TM2_CH2: J1.17 MCU1.55 | length 401.7
  Bottom Layer w8: J1.17 3519.16,3158.16 3656.94,3295.94 MCU1.55
TM3_CH1: J2.25 MCU1.22 | length 242.3
  Bottom Layer w8: MCU1.22 4434.05,3374.68 4453.74,3355 J2.25
TM3_CH2: J2.23 MCU1.23 | length 250.4
  Bottom Layer w8: MCU1.23 4415,3355 4454.37,3315.63 J2.23
TM4_CH1: J1.11 MCU1.58 | length 377.2
  Bottom Layer w8: J1.11 3542.27,3276.27 3621,3355 MCU1.58
TM4_CH2: J1.9 MCU1.59 | length 369.1
  Bottom Layer w8: J1.9 3541.64,3315.64 3600.68,3374.68 MCU1.59
TM4_CH3: J1.7 MCU1.61 | length 369.1
  Bottom Layer w8: J1.7 3547.01,3355.01 3606.05,3414.05 MCU1.61
TM4_CH4: J1.5 MCU1.62 | length 360.9
  Bottom Layer w8: J1.5 3551.38,3394.38 3590.74,3433.74 MCU1.62
TM5_CH1: J2.22 MCU1.14 | length 690.6
  Top Layer w8: v1@4177.32,3454.53 4375.47,3454.53 4534.06,3295.94 v1(4599.32,3295.94)
  Bottom Layer w8: MCU1.14 4137.18,3472.72 4155.36,3454.53 v1(4174.32,3454.53) ; v1(4599.32,3295.94) J2.22
TM5_CH2: J2.24 MCU1.15 | length 640.3
  Top Layer w8: v1@4195.32,3484.57 4380.43,3484.57 4529.69,3335.31 v1(4599.32,3335.31)
  Bottom Layer w8: MCU1.15 4156.86,3497.03 4169.32,3484.57 v1(4192.32,3484.57) ; v1(4599.32,3335.31) J2.24
TM8_CH1: J1.14 MCU1.37 | length 905.9
  Top Layer w8: v1(3330.85,3217.21) 4027.68,3217.21 v1(4070.32,3174.57)
  Bottom Layer w8: J1.14 v1(3330.85,3217.21) ; v1(4070.32,3174.57) 4097.81,3147.09 MCU1.37
TM8_CH2: J1.16 MCU1.38 | length 859.3
  Top Layer w8: v1(3330.85,3177.84) v1(4029.32,3177.82)
  Bottom Layer w8: J1.16 v1(3330.85,3177.84) ; v1(4029.32,3177.82) 4078.12,3129.02 MCU1.38
TM8_CH3: J1.18 MCU1.39 | length 1566.2
  Top Layer w8: v1(3210,3120) 3210,2753 3323,2640 v1(3390,2640)
  Bottom Layer w8: v1(3210,3120) 3228.47,3138.47 J1.18 ; v1(3390,2640) 3485,2640 3788,2943 3805.63,2943 3983,2943 4058.44,3018.44 MCU1.39
TM8_CH4: J1.20 MCU1.40 | length 1531
  Bottom Layer w8: J1.20 3223.86,3099.1 3201,3076.24 3201,2699 3235,2665 3485,2665 3780,2960 3975.96,2960 4038.75,3022.79 MCU1.40
Touch: C13.1 U3.3 | length 1806.6
  Top Layer w10: 4480.32,3864.58 4600.32,3864.58 ; 4499.58,3823.84 4559.58,3823.84 4559.58,3763.84 ; 4499.58,3905.32 4559.58,3905.32 ; 4518.84,3783.1 4600.32,3864.58 ; 4518.84,3946.07 4559.58,3905.32 ; 4559.58,3965.32 4559.58,3905.32 ; 4600.32,3744.58 4600.32,3864.58 ; 4600.32,3984.58 4600.32,3864.58 ; 4641.06,3763.84 4641.06,3823.84 4701.06,3823.84 ; 4650.32,3974.58 v3(4650.32,3914.58) 4710.32,3914.58 ; 4681.81,3783.1 4600.32,3864.58 ; 4681.81,3946.07 4600.32,3864.58 ; 4720.32,3864.58 4600.32,3864.58 ; 4559.58,3905.32 4600.32,3864.58
  Bottom Layer w10: U3.3 v3(4650.32,3914.58) 4707.32,3857.58 C13.1
UART-RXD2: J2.26 MCU1.17 | length 514.8
  Bottom Layer w8: MCU1.17 4423.11,3473.11 4460,3510 4530,3510 4565,3475 4565,3420 4610.32,3374.68 J2.26
UART-TXD2: J2.28 MCU1.16 | length 583.9
  Bottom Layer w8: MCU1.16 4427.25,3557.75 4460,3525 4538.5,3525 4585,3478.5 4585,3430 4600.95,3414.05 J2.28
VBUS: C2.1 C4.2 C5.2 COM1.A9 COM1.B4 D1.2 J1.1 J1.2 LED1.2 R3.1 U1.1 | length 1691.1
  Top Layer w10: LED1.2 3408.01,3889.25 3408.01,3878.73 3447.01,3839.73 3447.99,3839.73 R3.1@3458.74,3828.98
  Top Layer w20: U1.1 3307.4,3674.83 3307.63,3674.6 v1(3340.6,3674.6) 3400.4,3674.6 C5.2 3405,3774.26 3452.01,3821.27 3452.99,3821.27 3458.74,3827.02 R3.1 3458.74,3828.98 3464.49,3834.73 3465.47,3834.73 3490.74,3860 3600,3860 3683.28,3943.28 C2.1
  Bottom Layer w10: COM1.A9 3347.1,3745.38 3347.1,3791.79 3377.83,3822.53 3492.32,3822.53 3523.06,3791.79 3523.06,3745.33 COM1.B4
  Bottom Layer w20: v1@3340.6,3674 3309,3674 3225,3590 D1.2 3225,3503.28 3255.32,3472.96 3255.32,3455.24 3257.13,3453.43 J1.2 3338.43,3453.43 3358.12,3473.12 J1.1 ; v1(3340.6,3674.6) COM1.A9 ; J1.1@3465.21,3474.93 3465.21,3503.21 3487.04,3525.04 3516.04,3525.04 C4.2
VDD: C1.2 C6.1 C7.2 C12.2 C14.1 D2.2 J2.30 J2.31 MCU1.1 MCU1.13 MCU1.19 MCU1.32 MCU1.48 MCU1.64 R5.1 R8.1 U1.5 U2.23 U2.24 U3.4 U3.5 U4.3 U4.4 | length 6316.6
  Top Layer w8: C7.2 4020.5,3800 4034,3786.5 4034,3785 4064,3755 v1(4162.6,3755) ; U2.23 v1(4162.6,3755) ; U2.24 4178.3,3763.3 4170,3755 v1(4162.6,3755)
  Top Layer w10: 3610.47,3668.53 3610.47,3669.53 ; C6.1 3744.17,3801.26 3764.76,3821.85 3764.76,3823.82 3785.94,3845 3974,3845 4005,3814 4005,3812.5 4017.5,3800 C7.2
  Top Layer w16: 3610.47,3668.53 v1(3727,3552)
  Top Layer w20: U1.5 3307.4,3487.4 C1.2 3425.94,3485 3610.47,3669.53 3724.65,3783.7 3724.65,3785.67 3740.24,3801.26 C6.1
  Bottom Layer w10: R8.1 3710.98,2622.52 3721.73,2611.77 3721.73,2610.79 3754.25,2578.27 D2.2 4168.39,2578.27 ; MCU1.64 3749.89,3473.11 3727,3496 v1(3727,3552) C14.1 ; MCU1.48 3881.27,3186.27 3895,3200 3895,3452 3770.06,3576.94 3754.06,3576.94 C14.1 ; U4.4 4168.39,2800 ; MCU1.32 4195.95,3177.83 ; U3.5 4400.18,3754.88 ; U3.4 4437.58,3767.58 4424.88,3754.88 4400.18,3754.88 ; J2.31 4448.11,3473.11 4408.74,3433.74 MCU1.19 4225.74,3433.74 4210,3418 ; R5.1 4589.53,2578.27 4168.39,2578.27 ; J2.30 4672.48,3647.52 4615,3705 C12.2 4400.18,3705.18 4400.18,3754.88 ; C14.1 3781.55,3606.55 3871,3606.55 3881.27,3596.27 MCU1.1 3881.27,3513.73 4118,3277 ; 4118,3277 4195.95,3199.05 4195.95,3177.83 ; 4118,3277 4155,3277 4210,3332 4210,3418 ; 4168.39,2578.27 4168.39,2800 ; 4168.39,2800 4195.95,2827.56 U4.3 4195.95,3177.83 ; 4210,3418 4168,3418 4117.49,3468.51 MCU1.13 4117.49,3600.49 4162.6,3645.6 v1(4162.6,3755) 4400.06,3755 4400.18,3754.88
XTALA: C11.1 MCU1.5 Y1.1 | length 284.7
  Bottom Layer w8: C11.1 3852.45,3737.45 Y1.1 3949.71,3737.45 3960.01,3727.15 MCU1.5
XTALB: C8.2 MCU1.6 Y1.3 | length 202.5
  Bottom Layer w8: MCU1.6 3979.7,3648.41 3990,3658.71 Y1.3 C8.2@4087.25,3658.71
XTALC: MCU1.3
XTALD: MCU1.4
pads on no net: COM1.0@3321.34,3801.16 COM1.0@3548.89,3801.16 COM1.A8 COM1.B8 J1. J1.4 J1.30 J1.31 J2. J2.1 J2.2 J2.5 J2.6 J2.7 J2.8 J2.9 J2.18 J2.20 U1.4 U2.1 U2.2 U2.3 U2.6 U2.7 U2.8 U2.9 U2.10 U2.11 U2.12 U2.13 U2.14 U2.15 U2.16 U2.19 U2.20 U2.21 U2.22 U2.25 U2.28

## Polygon pours and split planes (outlines as drawn)
GND on Top Layer "GND_L01_P000" (solid, remove dead copper, pour order 0): 2854.33,4330.71 5314.96,4330.71 5314.96,2263.78 2854.33,2263.78
GND on Bottom Layer "GND_L02_P001" (solid, remove dead copper, pour order 1): 3051.18,4232.28 4921.26,4232.28 4921.26,2263.78 3051.18,2263.78

## Keep-outs
Keep-Out Layer:
  the board outline again, w5

## Other copper
Top Layer:
  pour cut-out: 4454.32,3864.58 ccw(c4600.32,3864.58) 4600.32,3718.58 ccw(c4600.32,3864.58) 4746.32,3864.58 ccw(c4600.32,3864.58) 4600.32,4010.58 ccw(c4600.32,3864.58)
Bottom Layer:
  pour cut-out: 4412.32,4021.46 4781.42,4021.46 4781.42,3731.26 4412.32,3731.26

## Silkscreen, mask and mechanical layers (free items; w line width, h text height)
Top Overlay:
  drawing of 1008 lines, arcs and shapes, not listed
  text "3.14" at 3910,3875.74 h80
  text "SwiperWitty" at 3387.76,3000.08 h90 r90
  text "https://github.com/" at 3277.76,2703.08 h90 r90
  text "RST" at 4570,2579.74 h80
Bottom Overlay:
  lines w5: 4085,3820 4110,3820 4110,3845 4110,3860 4135,3860 4135,3845 4135,3820 4160,3820 4160,3835 4160,3860 4185,3860
  text "Touch" at 4708.93,3858.74 h80
  text "HSE  8M" at 4060,3855.55 h60
  text "RTC  LSE" at 4060,3795.55 h60
  text "3V3" at 4746.58,3596.26 h80 r90
  text "MCU" at 4419,3510.74 h80
  text "LCD" at 4197,2600.74 h80
Top Solder:
  lines w30: 3302,2917 3302.28,2917.28 ; 3302.14,3095.14 3302.42,3095.42 ; 3681.24,3891.13 3681.52,3891.41 ; 3682,3831.89 3682.28,3832.17
  text "Caven" at 3905.07,3955.74 h80
Mechanical 15:
  lines w5: 3363.43,2498.16 3363.43,2821.54 ; 3443.9,2868.83 3443.9,3171.54 ; 3742.2,3801.26 3742.2,3923.28 ; 3781.27,3108.19 3836.71,3108.19 3851.71,3093.19 3881.27,3093.19 ; 3947.91,2489.85 3947.91,2889.64 ; 4176.32,3092.96 4261.32,3092.96 4276.55,3108.19

## Text inside footprints (layer, text, board x,y; h text height)
U4: Bottom Overlay "1" at 4240.69,2824.27 h60 r180